# Altium PCB DR-RL20V3.pcbdoc
Units mm, origin at the board's own origin, x right, y up, seen from the top; angles counter-clockwise.
Board outline 72 x 31 mm, 2 copper layers (Top Layer, Bottom Layer); 30 components, 29 nets, 71 pads, 0 vias.
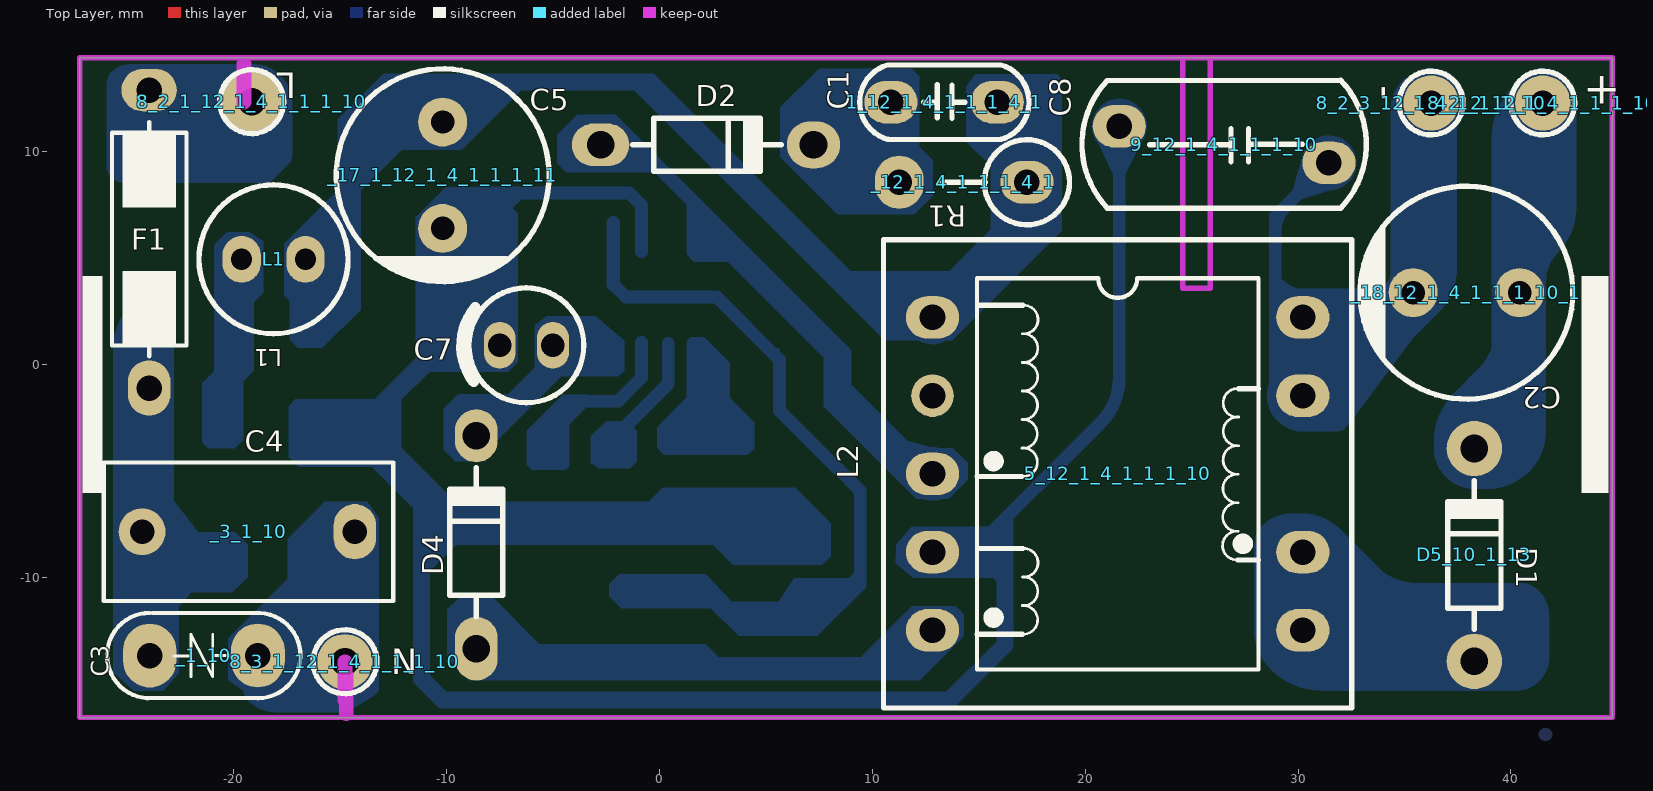
[diagram p0: Top Layer view]
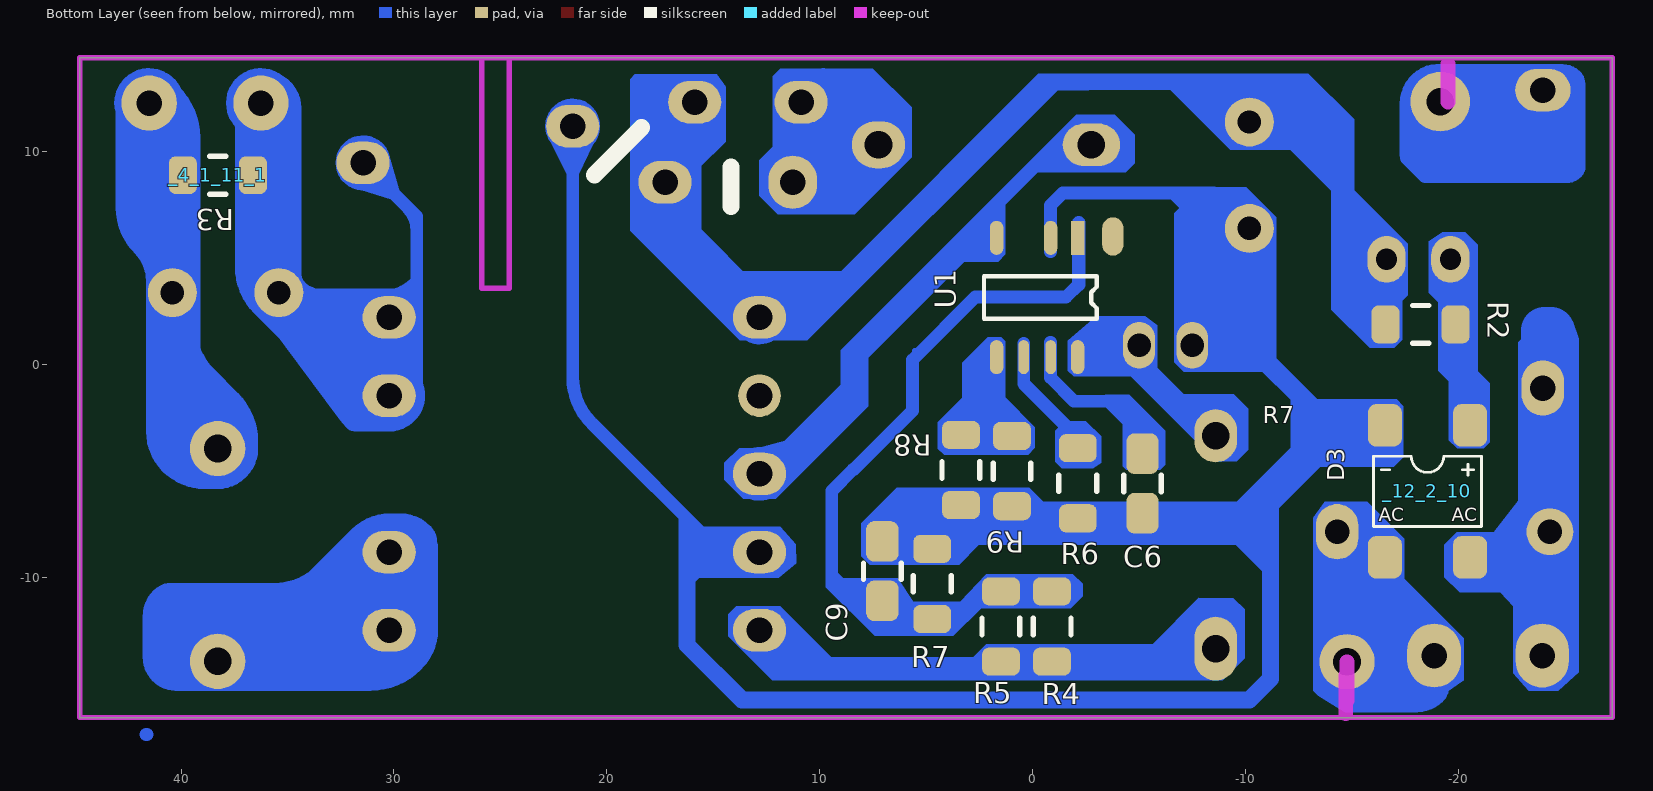
[diagram p1: Bottom Layer view, seen from below]

## Layer stack, top to bottom
Top Solder: solder mask 0.0102, Solder Resist, Dk 3.5
Top Layer: signal copper 0.0356
Dielectric1: dielectric 0.32, FR-4, Dk 4.8
Bottom Layer: signal copper 0.0356
Bottom Solder: solder mask 0.0102, Solder Resist, Dk 3.5

## Board outline
-27.24,-16.59 -27.24,14.41 44.76,14.41 44.76,-16.59

## Design rules (kind name [scope] priority, off if disabled: settings)
Clearance [All] p1: gap=0.254 ignorepadtopadclearanceinfootprint=FALSE except(0: Arc-Hole Track-Hole SMDPad-Hole THPad-Hole Via-Hole Fill-Hole Poly-Hole Region-Hole Text-Hole)
PolygonConnect [All] p1: connectstyle=Relief reliefconductorwidth=0.254 reliefentries=4 polygonreliefangle="90 Angle" airgapwidth=0.254
RoutingVias [All] p1: holewidth=0.711 width=1.27 viastyle="Through Hole" minholewidth=0.711 minwidth=1.27 maxholewidth=0.711 maxwidth=1.27
SilkToSolderMaskClearance SilkscreenOverComponentPads [IsPad] p1: minsilkscreentomaskgap=0.254 clearancetoexposedcopper=TRUE
SolderMaskExpansion [All] p1: expansion=0.102
Width [All] p1: maxlimit=0.254 minlimit=0.254 preferedwidth=0.254
29 further rules are at their usual default settings.

## Components (designator, comment, footprint, x,y, rotation, side; value= is the part's Value field where it differs from the comment)
1_12_1_4_1_1_1_4_1 "Comment" PCBComponent_1#1 13.368,12.325 r0 top
5_12_1_4_1_1_1_10 "Comment" PCBComponent_1#2 21.525,-5.14 r180 top
8_2_1_12_1_4_1_1_1_10 "AC" "jum don"#1 -19.16,12.35 r180 top (schematic designator P4)
8_2_2_12_1_4_1_1_1_10 "AC" "jum don"#2 41.5,12.285 r180 top (schematic designator P4)
8_2_3_12_1_4_1_1_1_10 "AC" "jum don"#2 36.25,12.285 r180 top (schematic designator P4)
8_3_1_12_1_4_1_1_1_10 "AC" "jum don"#3 -14.781,-13.965 r180 top (schematic designator P4)
9_12_1_4_1_1_1_10 "Comment" PCBComponent_1#3 26.525,10.335 r180 top
_1_10 "FNR07K561" "varistor 7K561" -21.415,-13.675 r180 top
_3_1_10 "104/305V MKP" "tu AC 104 305VAC" -19.313,-7.858 r0 top (schematic designator C1)
_4_1_11_1 "330K" R1206 38.27,8.895 r90 bottom (schematic designator R3)
_12_1_4_1_1_1_4_1 "Comment" "R1W dung" 14.261,8.563 r90 top
_12_2_10 "ABS16 SMD" "ABS16 smd" -18.56,-5.96 r90 bottom (schematic designator D0)
_17_1_12_1_4_1_1_1_11 "Comment" 220uF35V -10.191,8.892 r90 top
_18_12_1_4_1_1_1_10_1 "Comment" 220uF35V 37.91,3.375 r0 top
C6 "Comment" 1206/0805 -5.17,-5.59 r270 bottom
C7 "100uF/16V" 100uF/25V/6.3x12x2.5 -6.26,0.9 r0 top (schematic designator C4)
C9 "Comment" 1206/0805 7.05,-9.71 r270 bottom
D2 "SF18G" "1N4007 10MM"#1 2.23,10.32 r180 top (schematic designator D5)
D4 "SF18G" "1N4007 10MM"#2 -8.61,-8.35 r270 top (schematic designator D5)
D5_10_1_13 "SF18G" "1N4007 10MM"#3 38.285,-8.95 r270 top (schematic designator D5)
F1 "1A" "cau tri 1 A nam" -23.98,5.892 r90 top
L1 "Comment" PCBComponent_1#4 -18.138,4.942 r270 top
R2 "330K" R1206 -18.236,1.884 r270 bottom (schematic designator R3)
R4 "330K" R1206 -0.921,-12.31 r0 bottom (schematic designator R3)
R5 "330K" R1206 1.479,-12.31 r0 bottom (schematic designator R3)
R6 "330K" R1206 -2.13,-5.577 r0 bottom (schematic designator R3)
R7 "330K" R1206 4.71,-10.31 r180 bottom (schematic designator R3)
R8 "330K" R1206 3.359,-4.956 r0 bottom (schematic designator R3)
R9 "330K" R1206 0.96,-5.009 r0 bottom (schematic designator R3)
U1 "Comment" "IC MP024-10" -2.022,6.048 r270 bottom

## Footprints (in the part's own frame and the unit in brackets; to place one, negate y for a bottom-side part, rotate by r counter-clockwise, add the part's x,y. Pads: shape width x height; smd on the part's side, far side on the other; paste and mask are expansions set on the pad)
"1N4007 10MM"#1 [mm] "1N4007-FR107-10MM"
  oval 2.7x2 hole 1.3: 1(5,0)
  oval 2.5x2.2 hole 1.3: 2(-5,0)
  silkscreen extent -3.5,-1.25 3.5,1.25
"1N4007 10MM"#2 [mm] "1N4007-FR107-10MM"
  oval 3x2 hole 1.3: 1(5,0)
  oval 2.5x2 hole 1.3: 2(-5,0)
  silkscreen extent -3.5,-1.25 3.5,1.25
"1N4007 10MM"#3 [mm] "1N4007-FR107-10MM"
  round 2.6 hole 1.3: 1(5,0) 2(-5,0)
  silkscreen extent -3.5,-1.25 3.5,1.25
100uF/25V/6.3x12x2.5 [mm]
  oval 1.5x2.2 hole 1.1 mask+0.106: 1(1.25,0) 2(-1.25,0)
  silkscreen extent -3.05,-2.7 2.7,2.7
220uF35V [mm]
  round 2.3 hole 1.1 mask+0.127: 1(2.5,0) 2(-2.5,0)
  silkscreen extent -5.02,-5 5,5
1206/0805 [mil]
  rrect50% 75x60 smd: 1(55,0) 2(-55,0)
  silkscreen extent -15,-35 15,35
"ABS16 smd" [mm]
  rrect50% 2x1.6 smd: 1(3.1,-2) 2(-3.1,-2) 3(-3.1,2) 4(3.1,2)
  silkscreen extent -1.65,-2.54 1.65,2.54
"cau tri 1 A nam" [mm]
  oval 2.6x2 hole 1.2: 1(-7,0)
  oval 2x2.6 hole 1.2: 2(7,0)
  silkscreen extent -5.5,-1.75 5.5,1.75
"IC MP024-10" [mm]
  rect 1.6x0.635 smd: 1(0.096,0.105)
  oval 1.6x0.635 smd: 2(0.096,-1.165) 4(0.096,-3.705) 5(5.704,-3.705) 8(5.704,0.105)
  oval 1.6x0.5 smd: 6(5.704,-2.435) 7(5.704,-1.165)
  silkscreen extent 1.9,-4.3 3.9,0.99, body extent 0.9,-4.3 4.9,0.7, height 1.75
"jum don"#1 [mm]
  round 2.8 hole 1.3 mask+0.106: 1(0,0)
  silkscreen extent -1.5,-1.5 1.5,1.5
"jum don"#2 [mm]
  round 2.6 hole 1.2 mask+0.106: 1(0,0)
  silkscreen extent -1.5,-1.5 1.5,1.5
"jum don"#3 [mm]
  round 2.6 hole 1.3 mask+0.106: 1(0,0)
  silkscreen extent -1.5,-1.5 1.5,1.5
PCBComponent_1#1 [mm]
  oval 2.5x2 hole 1.2: 1(-2.5,0) 2(2.5,0)
  silkscreen extent -3.97,-1.75 3.99,1.75
PCBComponent_1#2 [mm]
  oval 2.5x2 hole 1.2: 1(8.7,-7.35) 3(8.7,0) 4(8.7,3.675) 5(8.7,7.35) 6(-8.7,7.35) 7(-8.7,3.675) 9(-8.7,-3.675) 10(-8.7,-7.35)
  round 2 hole 1.2: 2(8.7,-3.675)
  silkscreen extent -11,-11 11,11
PCBComponent_1#3 [mm]
  oval 2.5x2 hole 1.2: 1(-4.925,0.863) 2(4.925,-0.863)
  silkscreen extent -6.68,-3.01 6.68,2.99
PCBComponent_1#4 [mm]
  oval 2.2x1.8 hole 1 mask+0.106: 1(0,1.5) 2(0,-1.5)
  silkscreen extent -3.5,-3.5 3.5,3.5
"R1W dung" [mm]
  oval 2x2.5 hole 1.2: 1(0,-3)
  oval 2.5x2.3 hole 1.2: 2(0,3)
  silkscreen extent -2,-5 2,1.1
R1206 [mm]
  rrect50% 1.778x1.32 smd: 1(0,1.649) 2(0,-1.649)
  silkscreen extent -0.89,-0.38 0.89,0.38
"tu AC 104 305VAC" [mm]
  round 2.2 hole 1.15: 1(-5,0)
  oval 2x2.6 hole 1.15: 2(5,0)
  silkscreen extent -6.8,-3.25 6.8,3.25
"varistor 7K561" [mm]
  oval 2.5x3 hole 1.2: 1(2.54,0)
  oval 2.53x3 hole 1.2: 2(-2.54,0)
  silkscreen extent -4.54,-2 4.54,2

## Part data
8_2_1_12_1_4_1_1_1_10 8_2_2_12_1_4_1_1_1_10 8_2_3_12_1_4_1_1_1_10 8_3_1_12_1_4_1_1_1_10: library part "Header 1"
_1_10 _3_1_10: library part Cap, "Capacitor"
_4_1_11_1 F1 R2 R4 R5 R6 R7 R8 R9: library part Res, "Resistor"
C7: library part "Cap Pol", "Polarized Capacitor"
D2 D4 D5_10_1_13: library part Diode, "Diode"

## Free pads (board coordinates)
  oval 1x1.8 smd far side: 0(-3.779,6.016)

## Nets (pads, with @x,y where several pads share a name; then routed paths per layer and width w, separated by ;. In a path a pad name is that pad's centre, name@x,y a point inside that pad or via, vN(x,y) a via of type N, cw(c..) or ccw(c..) an arc to the next point about the centre after c; other vN are vias at no path point)
12VDC: 
30%: 
40%: 
50%: 
60%: 
GND: 
NetC1_1: 
NetC6_1: 
NetC6_2: 
NetC8_1: 
NetC9_1: 
NetC10_1: 
NetC10_2: 
NetC11_1: 
NetD1_1: 
NetK1_3: 
NetQ1_2: 
NetR12_2: 
NetR17_1: 
NetR18_1: 
NetR19_1: 
P1.2: 
P1.5: 
P1.6: 
P1.7: 
PP: 
RST/SBWTDIO: 
TEST/SBWTCK: 
VCC: 
pads on no net: 1_12_1_4_1_1_1_4_1.1 1_12_1_4_1_1_1_4_1.2 5_12_1_4_1_1_1_10.1 5_12_1_4_1_1_1_10.2 5_12_1_4_1_1_1_10.3 5_12_1_4_1_1_1_10.4 5_12_1_4_1_1_1_10.5 5_12_1_4_1_1_1_10.6 5_12_1_4_1_1_1_10.7 5_12_1_4_1_1_1_10.9 5_12_1_4_1_1_1_10.10 8_2_1_12_1_4_1_1_1_10.1 8_2_2_12_1_4_1_1_1_10.1 8_2_3_12_1_4_1_1_1_10.1 8_3_1_12_1_4_1_1_1_10.1 9_12_1_4_1_1_1_10.1 9_12_1_4_1_1_1_10.2 _1_10.1 _1_10.2 _3_1_10.1 _3_1_10.2 _4_1_11_1.1 _4_1_11_1.2 _12_1_4_1_1_1_4_1.1 _12_1_4_1_1_1_4_1.2 _12_2_10.1 _12_2_10.2 _12_2_10.3 _12_2_10.4 _17_1_12_1_4_1_1_1_11.1 _17_1_12_1_4_1_1_1_11.2 _18_12_1_4_1_1_1_10_1.1 _18_12_1_4_1_1_1_10_1.2 C6.1 C6.2 C7.1 C7.2 C9.1 C9.2 D2.1 D2.2 D4.1 D4.2 D5_10_1_13.1 D5_10_1_13.2 F1.1 F1.2 L1.1 L1.2 R2.1 R2.2 R4.1 R4.2 R5.1 R5.2 R6.1 R6.2 R7.1 R7.2 R8.1 R8.2 R9.1 R9.2 U1.1 U1.2 U1.4 U1.5 U1.6 U1.7 U1.8
copper on no net: | length 785
  Top Layer w0.25: 12.375,2.21 12.825,2.21
  Bottom Layer w0.25: -23.99,-7.54 -23.99,-1.765 -23.54,-1.315 ; -15.74,-9.865 -13.89,-8.015 -13.415,-8.015 -13.315,-7.915 ; 8.063,9.26 11.7,9.26 ; 12.075,-4.94 12.575,-4.94 ; 12.825,2.41 16.8,6.385 16.8,9.71 ; 14.575,12.385 14.575,12.585 ; 21.6,10.373 22.425,11.198 ; 30.225,-8.615 31.725,-8.615 35.525,-12.415 ; 31.45,9.473 32.275,9.473 ; 40.75,-2.985 40.75,6.185
  Bottom Layer w0.254: -14.545,-3.264 -9.074,2.207 -9.074,6.047 ; -13.976,-3.613 -13.688,-3.613 -10.303,-6.999 3.852,-6.999 ; -13.956,-3.32 -12.769,-3.32 ; -12.039,11.23 -9.068,11.23 ; -11.167,-13.698 -11.167,-6.35 ; -10.11,11.422 -10.11,11.63 -8.272,13.468 -0.364,13.468 10.894,2.21 12.825,2.21 ; -9.222,-15.643 13.757,-15.643 16.098,-13.302 16.098,-10.263 14.65,-8.815 ; -4.335,-6.841 -4.078,-6.584 ; -2.788,10.588 -1.577,10.588 2.654,6.357 2.654,5.907 ; -0.867,-10.45 1.386,-10.45 1.579,-10.257 ; 0.753,-2.912 1.149,-3.307 3.359,-3.307 ; 1.096,-13.926 1.225,-14.055 ; 1.121,-6.735 1.194,-6.809 3.106,-6.809 ; 1.636,6.006 2.554,6.006 2.654,5.907 ; 4.181,-7.563 4.289,-7.671 ; 4.47,-11.821 6.981,-11.821 7.569,-11.821 8.722,-10.668 ; 5.537,0.645 5.537,-2.084 8.393,-4.939 ; 8.411,-0.043 8.411,0.761 ; 8.897,-1.169 8.897,-0.337 2.654,5.907 ; 10.367,-14.534 12.411,-12.49 12.825,-12.49
  Bottom Layer w0.3: -19.18,13.967 -24.906,13.967 ccw(c-24.906,12.943) -25.63,13.667 ccw(c-25.147,13.185) -25.83,13.185 -25.83,9.28 ccw(c-25.318,9.28) -25.68,8.917 ccw(c-25.076,9.521) -25.076,8.667 -18.846,8.667 ccw(c-18.846,9.129) -18.52,8.803 ccw(c-18.652,8.935) -18.465,8.935 ; -16.805,-16.108 -16.805,-16.167 ccw(c-16.772,-16.167) -16.795,-16.19 ; -16.465,-16.19 -16.795,-16.19 ; -15.815,4.91 cw(c-15.755,4.91) -15.797,4.953 ; -13.49,-7.09 ccw(c-13.852,-7.452) -13.852,-6.94 -15.399,-6.94 ccw(c-15.399,-7.281) -15.64,-7.04 -17.105,-8.505 ccw(c-17.019,-8.59) -17.14,-8.59 -17.14,-10.91 ; 29.66,3.425 ccw(c29.684,3.449) 29.684,3.415 33.473,3.415 ccw(c33.473,4.542) 34.27,3.745 ccw(c33.715,4.3) 34.5,4.3 34.5,5.365 ; 30.135,-2.99 31.84,-2.99 ccw(c31.84,-2.592) 32.122,-2.873 ccw(c30.17,-0.922) 32.93,-0.922 ; 32.41,-2.535 35.67,1.855 ; 34.23,0.195 cw(c34.399,0.195) 34.279,0.314 35.108,1.143 36.464,2.499 ccw(c34.399,4.565) 37.32,4.565 ; 36.53,-4.035 36.53,-3.615 cw(c39.596,-3.615) 37.428,-1.447 38.552,-0.323 ccw(c36.384,1.845) 39.45,1.845 39.45,2.025 ; -19.43,-13.945 cw(c-18.918,-13.945) -19.28,-13.583 ccw(c-18.918,-13.945) -19.43,-13.945 ; -19.43,-13.945 cw(c-18.676,-13.945) -19.209,-13.412 -17.446,-11.649 ccw(c-18.185,-10.91) -17.14,-10.91 ; -19.43,-13.945 -19.43,-15.129 ccw(c-18.576,-15.129) -19.18,-15.733 ccw(c-18.094,-14.646) -18.094,-16.183 -16.814,-16.183 cw(c-16.814,-16.208) -16.795,-16.19 ; -17.14,-10.91 cw(c-18.42,-10.91) -17.515,-11.815 -18.732,-13.032 ccw(c-18.049,-13.715) -19.015,-13.715 ccw(c-16.359,-13.715) -18.237,-15.593 ccw(c-16.795,-14.151) -16.795,-16.19 ; 40.04,-3.95 ccw(c38.285,-3.95) 40.04,-3.95
  Bottom Layer w0.5: -17.505,12.267 ccw(c-19.117,12.267) -17.505,12.267
  Bottom Layer w0.6: -10.191,6.392 -8.525,8.057 -1.426,8.057 -0.85,7.481 -0.85,5.3 ; -4.71,-3.916 -4.71,-2.854 -3.58,-1.723 -1.95,-1.723 -0.845,-0.618 -0.845,1.049 ; -2.174,3.763 -1.578,3.166 2.689,3.166 5.637,0.218 5.637,-2.175 8.393,-4.931 ; -2.13,-3.928 -2.13,-3.44 0.408,-0.901 0.408,0.993 ; -0.921,-10.661 2.219,-10.661 3.405,-11.847 3.984,-11.847 4.039,-11.902 7.451,-11.902 9.427,-9.927 9.427,-5.937 8.429,-4.939 8.393,-4.939 ; 7.9,10.16 11.8,10.16 ; 8.185,8.405 8.423,8.167 ccw(c9.285,9.029) 9.285,7.81 11.685,7.81 ccw(c11.685,8.546) 12.206,8.026 ccw(c11.374,8.857) 12.55,8.857 12.55,9.198 ; 11.275,3.385 ccw(c12.361,4.471) 12.361,2.935 12.65,2.935 cw(c12.771,2.935) 12.685,3.02 12.929,3.264 cw(c13.1,3.094) 13.1,3.335 ; 11.45,3.21 cw(c10.303,2.063) 11.925,2.063 11.925,2.06 ; 11.6,3.085 12.199,3.085 ccw(c12.199,4.415) 13.14,3.475 ccw(c13.054,3.56) 13.175,3.56 ; 11.813,-4.128 12.225,-4.54 ; 11.95,-5.49 11.475,-3.84 12.95,-4.24 ; 12.414,9.526 11.723,10.217 cw(c13.891,12.385) 10.825,12.385 10.825,12.58 ; 12.45,2.21 12.825,2.21 ; 12.825,-8.815 14.65,-8.815 20.702,-2.763 ccw(c18.534,-0.595) 21.6,-0.595 21.6,11.198 ; 20.65,10.985 21.6,9.01 22.525,10.86 ; 28.925,5.585 28.925,6.299 cw(c30.461,6.299) 29.375,7.385 ; 29.025,2.935 cw(c29.025,3.035) 28.925,3.035 28.925,6.948 31.45,9.473 ; 29.025,3.81 ccw(c30.474,5.259) 30.474,3.21 30.575,3.21 ; 29.125,3.06 ccw(c29.975,3.06) 29.975,2.21 30.225,2.21 ; 29.745,-1.465 30.225,-1.465 ; 29.95,-7.44 30.58,-7.44 ; 30.25,-7.415 ccw(c30.25,-10.01) 28.415,-8.175 ccw(c28.873,-8.634) 28.225,-8.634 28.225,-12.46 ccw(c30.53,-12.46) 28.9,-14.09 28.952,-14.142 ccw(c31.12,-11.974) 31.12,-15.04 35.675,-15.04 40.225,-15.04 ccw(c40.225,-13.76) 41.13,-14.665 ccw(c40.213,-13.748) 41.51,-13.748 41.51,-13.004 ; 30.55,9.885 30,8.023 31.875,8.61 ; 33.432,-9.657 ccw(c35.6,-7.489) 35.6,-10.555 40.438,-10.555 cw(c40.438,-11.477) 41.09,-10.825 cw(c40.076,-11.839) 41.51,-11.839 41.51,-13.004 ; 34.212,-10.917 ccw(c36.38,-8.749) 36.38,-11.815 40.377,-11.815 cw(c40.377,-12.908) 41.15,-12.135 cw(c40.281,-13.004) 41.51,-13.004 ; 35,4.485 35.433,4.052 ; 37.22,-2.735 38.591,-1.364 ccw(c36.662,0.565) 39.39,0.565 ; 38.27,-5.555 38.873,-5.555 ccw(c38.873,-3.028) 40.66,-4.815 ccw(c38.994,-3.149) 41.35,-3.149 41.35,-1.715 41.35,3.926 cw(c43.484,3.926) 41.975,5.435 ccw(c40.044,7.366) 42.775,7.366 42.775,12.61 ; 39.4,-4.625 39.4,10.665 cw(c42.466,10.665) 40.298,12.833 40.7,13.235 cw(c41.605,12.33) 41.605,13.61 41.65,13.61 ; 41.605,-17.39 41.65,-17.39 ; 10.825,12.58 ccw(c9.785,12.58) 10.825,12.58 ; 11.8,10.16 12.4,9.56 11.8,10.16
  Bottom Layer w0.635: 8.075,-1.328 8.075,-0.7 ; 8.56,-0.083 8.56,-0.925 11.475,-3.84 11.313,-3.678 ; 28.285,-10.633 28.285,-8.351 cw(c29.053,-8.351) 28.51,-7.808 cw(c29.717,-9.015) 29.717,-7.308 30.16,-7.308 cw(c30.16,-9.601) 31.782,-7.979 35.574,-11.772
  Bottom Layer w0.65: -2.174,3.763 -2.174,6.66
  Bottom Layer w0.8: -18.465,8.935 -17.665,9.735 -17.665,10.485 -18.34,11.16 -18.34,11.535 ; -11.188,-6.078 -11.188,-14.765 -10.186,-15.767 13.636,-15.767 16.225,-13.178 16.225,-10.055 14.944,-8.774 12.675,-8.774 ; -13.626,-13.972 ccw(c-15.126,-13.972) -13.626,-13.972 ; 13.687,-5.14 ccw(c12.825,-5.14) 13.687,-5.14 ; 13.687,2.21 ccw(c12.825,2.21) 13.687,2.21 ; 18.36,9.085 ccw(c17.175,9.085) 18.36,9.085 ; 22.495,11.198 ccw(c21.6,11.198) 22.495,11.198 ; 31.087,-12.49 ccw(c30.225,-12.49) 31.087,-12.49 ; 31.087,-8.815 ccw(c30.225,-8.815) 31.087,-8.815 ; 31.087,-1.465 ccw(c30.225,-1.465) 31.087,-1.465 ; 31.087,2.21 ccw(c30.225,2.21) 31.087,2.21 ; 31.516,-12.49 ccw(c30.225,-12.49) 31.516,-12.49 ; 31.516,-8.815 ccw(c30.225,-8.815) 31.516,-8.815 ; 31.516,-1.465 ccw(c30.225,-1.465) 31.516,-1.465 ; 32.345,9.473 ccw(c31.45,9.473) 32.345,9.473 ; 37.492,12.285 ccw(c36.25,12.285) 37.492,12.285 ; 41.562,5.26 ccw(c40.65,5.26) 41.562,5.26 ; 42.742,12.285 ccw(c41.5,12.285) 42.742,12.285
  Bottom Layer w1: -16.405,-2.458 -16.405,-3.022 ccw(c-16.32,-3.022) -16.38,-3.083 ; -15.655,-4.083 -14.68,-4.083 ccw(c-14.68,-2.211) -13.357,-3.534 ; -15.24,-4.065 -14.048,-4.065 ; -13.759,-2.536 -15.23,-4.008 cw(c-15.411,-3.826) -15.411,-4.083 -16.905,-4.083 -16.905,-2.318 cw(c-16.82,-2.318) -16.88,-2.258 cw(c-16.759,-2.378) -16.759,-2.208 -16.405,-2.208 -13.3,-2.208 ; -8.905,-12.818 -7.4,-14.322 10.196,-14.322 12.028,-12.49 12.825,-12.49 ; 8.218,9.822 cw(c7.514,9.117) 8.51,9.117 ; 9.21,8.03 9.09,8.03 cw(c9.09,9.31) 8.185,8.405 cw(c8.668,8.888) 7.985,8.888 7.985,9.56 7.985,12.004 cw(c9.436,12.004) 8.41,13.03 cw(c9.315,12.125) 9.315,13.405 9.785,13.405 ; 10.9,3.76 12.185,2.475 ccw(c12.825,3.115) 12.825,2.21 12.45,2.21 ; 29.125,-1.465 29.125,3.06 ; 29.275,3.06 31.18,3.06 cw(c31.18,1.79) 32.45,1.79 ; 34.85,5.26 34.85,12.04 cw(c36.12,12.04) 36.12,13.31 36.175,13.31 ; 35.425,4.485 cw(c35.425,3.66) 36.25,3.66 ; 35.5,4.46 cw(c35.5,3.51) 36.45,3.51 ; 36.95,12.31 cw(c36.95,12.285) 36.975,12.285 36.975,4.325 ; -18.026,12.435 ccw(c-19.015,12.435) -18.026,12.435
  Bottom Layer w1.8: -23.855,-6.058 ccw(c-21.018,-6.058) -23.024,-8.063
  Bottom Layer w2: 12.825,2.21 17.175,6.56 17.175,8.635 ; 30.175,-2.04 30.25,-2.115 ; 30.475,-0.615 30.475,2.135
  Bottom Layer w2.2: -24.365,-3.758 -24.365,1.61 ; -24.065,-8.565 -24.065,1.61
  Bottom Layer w2.5: -24.21,-8.285 -24.065,-8.14

## Keep-outs
Keep-Out Layer:
  lines w0.25: -27.24,-16.59 -27.24,14.41 44.76,14.41 44.76,-16.59 -27.24,-16.59
  lines w0.254: 24.575,14.31 24.575,3.585 25.875,3.585 25.875,14.335
  lines w0.7: -19.53,12.342 -19.53,14.117 ; -14.781,-15.795 -14.781,-13.965 ; -14.72,-16.395 -14.72,-14.62

## Other copper
Bottom Layer:
  rectangle: -16.18,-3.833 -14.455,-2.258
  region: 14.4,13.06 14.41,13.05 14.41,10.47 15.62,9.26 15.62,7.91 18.878,7.91 18.901,7.933 18.9,7.935 18.9,13.41 18.68,13.63 14.83,13.63
  region: -6.425,7.935 -6.425,7.83 -7.875,6.38 -8.958,7.463 -8.958,8.004
  region: -17.634,4.328 -17.638,3.247 -17.38,2.989 -17.38,1.16 -17.002,0.781 -15.85,0.781 -14.048,2.583 -14.048,8.314
  region: -18.63,5.796 -18.63,3.361 -19.07,2.921 -19.07,-0.3 -19.564,-0.794 -19.564,-3.548 -19.949,-3.934 -21.202,-3.934 -21.491,-3.645 -21.491,-0.888 -20.913,-0.31 -20.913,5.627 -20.335,6.205 -19.255,6.205
  region: -10.039,8.329 -11.459,6.909 -11.459,0.289 -13.381,-1.633 -17.112,-1.633 -17.43,-1.952 -17.43,-4.357 -16.984,-4.803 -12.125,-4.803 -12.03,-4.708 -12.126,-4.612 -12.126,-1.665 -10.79,-0.33 -7.1,-0.33 -6.66,0.11 -6.66,7.116 -7.889,8.345
  region: 6.323,-10.05 5.598,-11.15 3.4,-11.15 2.178,-9.848 -1.901,-9.848 -2.365,-10.312 -2.365,-10.891 -1.806,-11.45 2.41,-11.45 3.71,-12.75 7.42,-12.75 9.711,-10.459 9.711,-9.457 9.118,-10.05
  region: -8.426,-10.973 -9.445,-10.973 -9.97,-11.498 -9.97,-13.793 -8.931,-14.832 12.224,-14.832 14.282,-12.774 14.282,-11.733 13.912,-11.363 11.844,-11.363 9.447,-13.76 2.776,-13.76 2.16,-13.144 -5.648,-13.144 -7.826,-10.966
  region: -9.554,-8.479 -11.146,-10.07 -11.295,-10.07 -11.295,-6.478 -11.167,-6.35
  region: 8.04,-7.46 6.368,-5.788 0.146,-5.788 -0.506,-6.44 -9.6,-6.44 -12.703,-3.337 -13.274,-3.908 -13.67,-3.908 -13.67,-4.67 -9.861,-8.479 2.515,-8.479 3.447,-9.41 7.64,-9.41 8.04,-9.01
  region: 1.279,1.089 1.279,-1.543 -0.12,-2.942 -0.12,-3.92 0.205,-4.245 4.155,-4.245 4.44,-3.96 4.44,-2.71 3.287,-1.557 3.287,0.089 2.103,1.273 1.463,1.273
  region: -5.296,2.26 -5.87,1.844 -5.87,-0.154 -7.117,-1.4 -8.12,-1.4 -9.448,-1.401 -10.137,-2.09 -10.137,-3.995 -9.596,-4.536 -8.596,-4.536 -7.758,-3.698 -3.227,0.837 -4.61,2.26
  region: -1.668,1.118 -1.668,-0.29 -1.939,-0.562 -5.398,-0.562 -5.46,-0.5 -5.46,1.52 -4.717,2.263 -2.987,2.264
  region: -2.104,11.735 -3.868,11.735 -4.818,10.786 -4.818,9.456 -4.384,9.022 -0.245,9.022 1.27,7.507 1.27,5.172 1.613,4.829 3.212,4.829 7.719,0.322 7.719,-1.97 12.053,-6.304 13.585,-6.304 14.471,-5.418 14.471,-4.628 13.777,-3.934 11.622,-3.934 9.012,-1.324 9.012,0.663 -2.054,11.729
  region: 14.461,4.36 14.429,4.392 8.995,4.392 -0.276,13.662 -12.967,13.662 -15.109,11.521 -15.109,8.196 -17.634,5.671 -17.634,4.328 -17.091,3.784 -16.42,3.784 -16.417,3.787 -15.984,3.787 -14.071,5.701 -14.071,8.145 -12.124,10.092 -9.301,10.092 -6.51,12.883 -2.648,12.883 -2.644,12.88 -1.18,12.88 10.571,1.129 13.749,1.129 18.906,6.286 18.901,6.291 18.901,9.576 17.932,10.546 16.446,10.546 15.563,9.663 15.563,4.795 15.476,4.708
  region: 11.843,13.904 12.198,13.549 12.198,10.232 12.838,9.593 12.838,7.934 11.961,7.058 8.36,7.058 5.68,9.738 5.68,12.092 7.492,13.904
  region: 35.481,-15.04 30.4,-15.04 30.05,-14.69 29.575,-14.69 29.575,-14.54 28.225,-13.19 28.225,-8.59 29.225,-7.59 31.817,-7.59 36.3,-12.073 36.3,-14.165
  region: 41.3,-2.07 41.3,4.06 41.55,4.31 41.45,4.41 41.45,4.96 42.725,6.235 42.725,12.56 42.775,12.61 41.775,13.61 41.025,13.61 39.475,12.06 39.475,-2.021
  region: 32.45,-1.59 30.6,-1.59 29.975,-0.965 29.975,3.185 31.675,3.185 32.45,2.41
  region: 36.975,5.01 35.175,5.01 34.85,5.335 34.85,12.04 36.73,12.04 36.975,12.285
  region: 37.32,4.565 36.66,6.225 34.57,6.315 34.46,5.805 34.5,4.3 34.27,3.745 33.8,3.495 31.34,3.425 30.97,-2.075 31.03,-2.975 32.07,-2.945 33.68,-0.725 34.55,0.325 35.53,1.545 36.87,2.975 37.2,3.715
  region: 41.51,-13.748 41.43,-11.195 40.8,-10.585 35.43,-10.505 33.22,-9.795 33.22,-15.085 38.09,-15.065 41.04,-14.875
  region: 41.35,-1.315 41.27,-4.005 40.36,-5.055 39.11,-5.615 37.74,-5.655 37,-5.155 36.5,-4.175 36.61,-3.285 37.33,-2.365 38.46,-1.255 39.29,-0.105 41.19,-0.155
  region: 39.38,1.205 38.97,0.205 37.89,-0.925 37.02,-1.925 36.6,-2.785 36.53,-3.615 37.18,-3.625 39.44,-1.045 39.56,0.805
  region: -14.665,-16.34 -18.092,-16.34 -20.26,-14.829 -20.26,-12.86 -17.46,-10.06 -17.46,-8.19 -15.72,-6.45 -13.729,-6.45 -13.198,-7.203 -13.198,-15.323 -13.44,-15.565
  region: -17.265,12.335 -17.265,9.785 -18.515,8.535 -24.623,8.535 -25.68,8.917 -25.805,9.717 -25.805,12.045 -25.83,13.185 -25.63,13.667 -24.906,13.967 -23.833,14.017 -18.971,14.017
  region: -18.233,-12.533 -19.43,-13.73 -19.43,-15.408 -18.655,-16.183 -16.472,-16.183 -16.465,-16.19 -16.43,-16.155 -16.43,-12.908 -16.805,-12.533
  region: -6.249,-4.249 -6.249,-3.119 -4.55,-1.42 -3.42,-1.42 -3.42,-1.885 -4.287,-2.752 -4.238,-2.8 -4.238,-4.78 -4.41,-4.952 -4.41,-4.956 -6.003,-4.956 -6.248,-4.711 -6.248,-4.494
  region: -3.23,-4.617 -3.23,-3.371 -2.516,-2.657 -1.505,-2.657 -1.06,-3.102 -1.06,-4.564 -1.374,-4.878 -1.456,-4.878 -2.865,-4.878
  region: -19.93,-7.89 -19.36,-8.46 -19.36,-9.99 -20.07,-10.7 -21.99,-10.7 -22.6,-11.36 -22.58,-14.51 -23.32,-15.32 -24.71,-15.34 -25.66,-14.46 -25.66,1.22 -25.38,2.02 -23.45,2.01 -23,1.21 -22.83,1.04 -22.83,-6.41 -21.667,-7.89
  region: 15.46,-7.63 11.84,-7.62 11.11,-8.44 11.1,-9.34 11.91,-10.03 15.73,-10.04 16.62,-10.06 16.61,-7.13

## Silkscreen, mask and mechanical layers (free items; w line width, h text height)
Top Overlay:
  rectangle: 43.31,-6.04 44.585,4.16
  rectangle: -27.115,-6.033 -26.17,4.167
  text "L" at -17.08,13.717 h1.2 r180
  text "-" at 34.6,12.36 h1.52 r90
  text "+" at 43.4,12.26 h1.52
  text "C1" at 8.88,11.97 h1 r90
  text "C5" at -6.1,11.94 h1
  text "C8" at 19.315,11.635 h1 r90
  text "R1" at 14.405,7.455 h1 r180
  text "L1" at -17.72,0.71 h0.8 r180
  text "C2" at 42.36,-1.065 h1 r180
  text "C4" at -19.48,-4.11 h1
  text "L2" at 9.335,-5.358 h1 r90
  text "D1" at 40.24,-8.595 h1 r270
  text "N" at -12.616,-14.565 h1.2
  text "C3" at -25.905,-14.683 h0.8 r90
Bottom Overlay:
  lines w0.8: 14.16,7.43 14.16,9.28 ; 18.36,11.13 20.585,8.905
  text "R3" at 37.51,7.305 h1 r180
  text "R7" at -10.82,-2.77 h0.8
  text "D3" at -14.655,-5.483 h0.8 r270

## Text inside footprints (layer, text, board x,y; h text height)
_12_2_10: Bottom Overlay "AC" at -16.274,-7.357 h0.64; Bottom Overlay "AC" at -19.703,-7.357 h0.64